# Allegro board 2_view_locked.brd
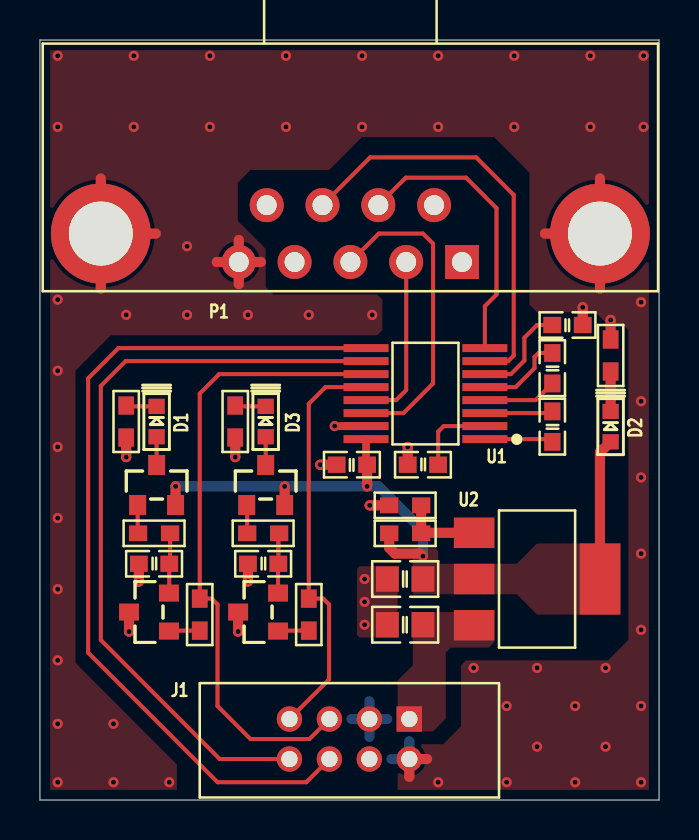
[diagram p0: board, top side]
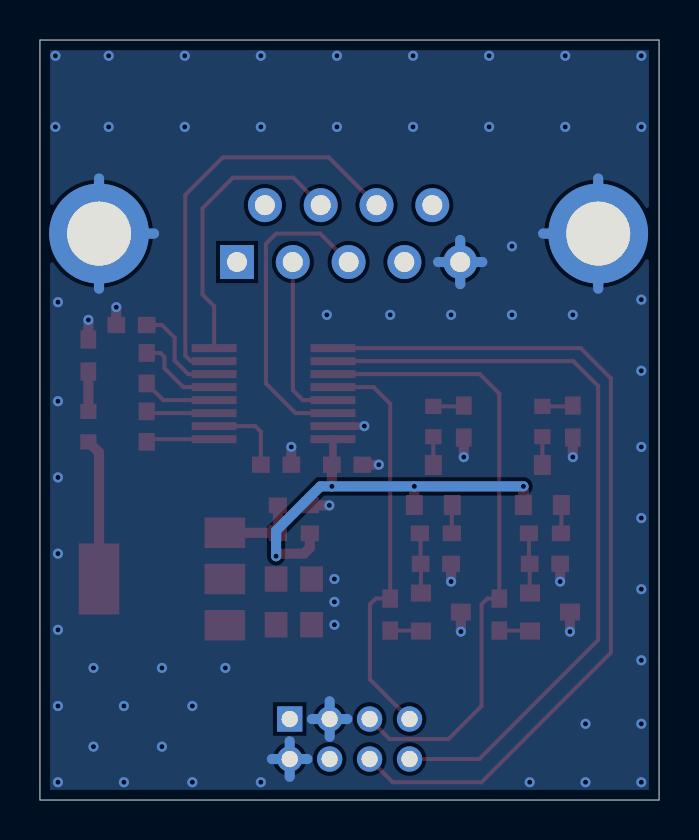
[diagram p1: board, bottom side, seen from below]

Outline 31 x 38 mm; copper layers: TOP, BOTTOM. Coordinates in mm from the lower left corner of the outline.
Outline path: 0,38 0,0 31,0 31,38 0,38

## Design rules (mm)
net group N23452239: nets N23452239 N23452241
net group N23452347: nets N23452347 N23452349
net group UART_RXD: nets N23452331 UART_RXD
net group UART_TXD: nets N23452223 UART_TXD

## Placement (name value [footprint] x y rotation side)
C1  0.1uF  [C0603]  25.65 18.67 90 top
C2  0.1uF  [C0603]  19.18 16.76 180 top
C3  0.1uF  [C0603]  15.62 16.76 0 top
C4  0.1uF  [C0603]  26.42 23.75 0 top
C5  0.1uF  [C0603]  25.65 21.59 90 top
C6  1uF  [C0603]  5.71 11.81 180 top
C7  10uF  [C0805]  18.29 8.76 180 top
C8  10uF  [C0805]  18.29 11.05 180 top
C9  1uF  [C0603]  11.18 11.81 180 top
D1  LED_GREEN  [LED0603]  5.84 18.92 90 top
D2  LED_GREEN  [LED0603]  28.57 18.67 90 top
D3  LED_GREEN  [LED0603]  11.3 18.92 90 top
J1  CONNECTOR  [DIP_2X4_2MM]  15.49 3.05 180 top
P1  -  [DB9_MALE]  3.05 28.32 0 top
Q1  2N5401  [SOT-23]  5.84 15.75 0 top
Q2  2N5401  [SOT-23]  5.46 9.4 90 top
Q3  2N5401  [SOT-23]  11.3 15.75 0 top
Q4  2N5401  [SOT-23]  10.92 9.4 90 top
R1  1K  [R0603]  5.71 13.34 180 top
R2  1K  [R0603]  8 9.27 270 top
R3  470R  [R0603]  4.32 18.92 270 top
R4  470R  [R0603]  28.57 22.23 90 top
R5  50K/1%  [R0603]  18.29 14.73 180 top
R6  82K/1%  [R0603]  18.29 13.34 180 top
R7  1K  [R0603]  11.18 13.34 180 top
R8  1K  [R0603]  13.46 9.27 270 top
R9  470R  [R0603]  9.78 18.92 270 top
U1  SP3232EEY  [TSSOP16]  19.3 20.32 180 top
U2  -  [LM1117-ADJ]  24.89 11.05 270 top

## Library data of the parts
C1-C5 = CAP NP_0
C6-C9 = CAP NP_1
D1 D3 = LED_4
D2 = LED
J1 = CONNECTOR_0
P1 = DB9_MALE_0
Q1-Q4 = 2N5401_1
R1-R4 R7-R9 = RES_1: signal model: DEFAULT_RESISTOR_470OHM_2_1
R5 R6 = RES_1
U1 = SP3232EEY_0
U2 = LM1117

## Footprints (pads in the part's own frame, mm; a bottom-side part is the same pattern mirrored in y, then rotated)
C0603
  rect 0.889x0.813 smd: 1(-0.762,0) 2(0.762,0)
C0805
  rect 1.143x1.27 smd: 1(-0.889,0) 2(0.889,0)
DB9_MALE
  rect 1.7x1.7 hole 1: 1(18.085,-1.422)
  round 1.7 hole 1: 2(15.291,-1.422) 3(12.497,-1.422) 4(9.703,-1.422) 5(6.909,-1.422) 6(16.688,1.422) 7(13.894,1.422) 8(11.1,1.422) 9(8.306,1.422)
  round 5 hole 3.2: 10(0,0) 11(24.994,0)
DIP_2X4_2MM
  rect 1.27x1.27 hole 0.813: 1(-3,-1)
  round 1.27 hole 0.813: 2(-3,1) 3(-1,-1) 4(-1,1) 5(1,-1) 6(1,1) 7(3,-1) 8(3,1)
LED0603
  rect 0.762x0.813 smd: 1(-0.76,0) 2(0.76,0)
LM1117-ADJ
  rect 1.524x2.032 smd: 1(-2.311,-3.15) 2(0,-3.15) 3(2.311,-3.15)
  rect 3.556x2.032 smd: 4(0,3.15)
R0603
  rect 0.914x0.787 smd: 1(-0.8,0) 2(0.8,0)
SOT-23
  rect 0.85x1 smd: 1(-0.95,-1) 2(0.95,-1) 3(0,1)
TSSOP16
  rect 2.25x0.4 smd: 1(-2.975,2.275) 2(-2.975,1.625) 3(-2.975,0.975) 4(-2.975,0.325) 5(-2.975,-0.325) 6(-2.975,-0.975) 7(-2.975,-1.625) 8(-2.975,-2.275) 9(2.975,-2.275) 10(2.975,-1.625) 11(2.975,-0.975) 12(2.975,-0.325) 13(2.975,0.325) 14(2.975,0.975) 15(2.975,1.625) 16(2.975,2.275)

## Nets
GND: C2.2 C3.1 C4.2 C6.2 C7.2 C8.2 C9.2 J1.2(8) J1.3(2) P1.5 P1.10 P1.11 Q2.3(COLLECTOR) Q4.3(COLLECTOR) R3.2 R4.2 R5.2 R9.2 U1.15(GND)
VCC_3V3: C3.2 C8.1 D2.1(ANODE) Q1.2(EMITTER) Q3.2(EMITTER) R6.2 U1.16(VCC) U2.2(OUT) U2.4(TAB)
VIN_5V: C7.1 J1.1 U2.3(IN)
RS232_CTS: P1.8 U1.7(T2OUT)
RS232_RTS: P1.7 U1.8(R2IN)
RS232_RXD: P1.2 U1.13(R1IN)
RS232_TXD: P1.3 U1.14(T1OUT)
UART_CTS: J1.8(5) U1.10(T2IN)
UART_RTS: J1.6 U1.9(R2OUT)
UART_RXD: J1.7(4) R8.1 U1.12(R1OUT)
UART_TXD: J1.5(3) R2.1 U1.11(T1IN)
N23451873: C1.1 U1.1(C1+)
N23451905: C5.1 U1.4(C2+)
N23451907: C1.2 U1.3(C1-)
N23451913: C4.1 U1.6(V-)
N23451915: C2.1 U1.2(V+)
N23451921: C5.2 U1.5(C2-)
N23452119: R5.1 R6.1 U2.1(ADJ)
N23452223: Q2.1(BASE) R2.2
N23452239: Q1.1(BASE) R1.2
N23452241: C6.1 Q2.2(EMITTER) R1.1
N23452262: D1.1(ANODE) Q1.3(COLLECTOR)
N23452331: Q4.1(BASE) R8.2
N23452347: Q3.1(BASE) R7.2
N23452349: C9.1 Q4.2(EMITTER) R7.1
N23452367: D3.1(ANODE) Q3.3(COLLECTOR)
N23452380: D3.2(CATHODE) R9.1
N234520751: D2.2(CATHODE) R4.1
N234522811: D1.2(CATHODE) R3.1

Pads without a net: J1 4; P1 1 4 6 9

## Via types
v1: diameter 0.508, hole 0.254, TOP to BOTTOM, 71 vias

## Routing (per net, layer and track width the routed paths; a pad name or vN(x,y) marks a point on that pad's centre or on a via; arc(x,y) is an arc through that point)
GND: length 62.6
  TOP w0.381: U1.15 v1(14.76,18.7)
  TOP w0.508: C9.2 v1(10.41,10.92) ; 8.85,26.9 P1.5 ; P1.5 11.06,26.9 ; P1.5 9.96,25.79 ; P1.5 9.96,28 ; P1.10 3.05,31.08 ; P1.10 3.05,25.57 ; P1.10 5.8,28.32 ; Q4.3 v1(9.92,8.42) ; C4.2 v1(27.18,24.64) ; P1.11 28.04,31.08 ; P1.11 28.04,25.57 ; P1.11 25.29,28.32 ; C2.2 v1(18.41,17.65) ; Q2.3 v1(4.46,8.42) ; R4.2 v1(28.57,24) ; R5.2 v1(16.51,14.73) ; R9.2 v1(9.78,17.14) ; R3.2 v1(4.32,17.14) ; 19.38,2.05 J1.2 18.49,1.16 ; C3.1 v1(14.03,16.76) ; C6.2 v1(4.95,10.92)
  BOTTOM w0.508: P1.10 5.8,28.32 ; P1.10 3.05,31.08 ; P1.10 3.05,25.57 ; P1.11 28.04,31.08 ; P1.11 28.04,25.57 ; P1.11 25.29,28.32 ; 15.6,4.05 J1.3 ; J1.3 17.38,4.05 ; J1.3 16.49,4.94 ; J1.3 16.49,3.16 ; J1.2 18.49,2.94 ; J1.2 19.38,2.05 ; J1.2 18.49,1.16 ; J1.2 17.6,2.05 ; P1.5 9.96,28 ; P1.5 8.85,26.9 ; P1.5 11.06,26.9 ; P1.5 9.96,25.79
  vias: v1(0.89,37.21) v1(0.89,33.66) v1(0.89,25.02) v1(0.89,21.46) v1(0.89,17.65) v1(0.89,14.1) v1(0.89,10.54) v1(0.89,6.99) v1(0.89,3.81) v1(0.89,0.89) v1(3.68,3.81) v1(3.68,0.89) v1(4.32,24.26) v1(4.7,37.21) v1(4.7,33.66) v1(6.48,0.89) v1(7.37,27.69) v1(7.37,24.26) v1(8.51,37.21) v1(8.51,33.66) v1(10.41,24.26) v1(12.32,37.21) v1(12.32,33.66) v1(13.46,24.26) v1(16.13,37.21) v1(16.13,33.66) v1(16.26,11.05) v1(16.26,9.91) v1(16.26,8.76) v1(16.64,24.26) v1(19.94,37.21) v1(19.94,33.66) v1(19.94,0.89) v1(21.72,6.6) v1(23.37,4.7) v1(23.37,0.89) v1(23.75,37.21) v1(23.75,33.66) v1(24.89,6.6) v1(24.89,2.67) v1(26.8,4.7) v1(26.8,0.89) v1(27.56,37.21) v1(27.56,33.66) v1(28.32,6.6) v1(28.32,2.67) v1(30.1,24.89) v1(30.1,19.94) v1(30.1,16.13) v1(30.1,12.32) v1(30.1,8.51) v1(30.1,4.7) v1(30.1,0.89) v1(30.23,37.21) v1(30.23,33.66)
VCC_3V3: length 28.3
  TOP w0.381: C3.2 16.33,16.82 U1.16
  TOP w0.508: Q1.2 v1(6.79,15.68) ; U2.4 28.04,17.38 D2.1 ; C3.2 v1(16.38,15.68) ; R6.2 17.49,12.61 17.78,12.32 19.05,12.32 ; Q3.2 v1(12.25,15.68)
  BOTTOM w0.508: v1(19.18,12.19) 19.18,13.46 16.96,15.68 v1(16.38,15.68) v1(12.25,15.68) v1(6.79,15.68)
RS232_CTS: length 20.9
  TOP w0.203: P1.8 16.54,32.13 21.84,32.13 23.72,30.25 23.72,22.23 23.44,21.94 U1.7
RS232_RTS: length 14.4
  TOP w0.203: P1.7 18.31,31.11 21.34,31.11 22.86,29.59 22.86,25.27 22.28,24.69 U1.8
RS232_RXD: length 8.6
  TOP w0.203: P1.2 18.34,20.5 17.84,20 U1.13
RS232_TXD: length 15.9
  TOP w0.203: U1.14 18.2,19.34 19.68,20.83 19.68,27.81 19.18,28.32 16.97,28.32 P1.3
UART_CTS: length 38.4
  TOP w0.203: J1.8 9,2.05 3.05,8 3.05,20.7 4.29,21.94 U1.10
UART_RTS: length 43.5
  TOP w0.203: J1.6 13.34,0.89 8.89,0.89 2.41,7.37 2.41,21.08 3.93,22.6 U1.9
UART_RXD: length 20.6
  TOP w0.203: U1.12 14.29,20.64 13.46,19.81 R8.1 14.19,10.07 14.48,9.78 14.48,6.03 J1.7
UART_TXD: length 31.8
  TOP w0.203: U1.11 8.98,21.3 8,20.32 R2.1 8.6,10.07 8.89,9.78 8.89,4.7 10.54,3.05 13.49,3.05 J1.5
N23451873: length 3.4
  TOP w0.203: U1.1 25.52,18.04 C1.1
N23451905: length 3.7
  TOP w0.203: U1.4 24.82,20 C5.1
N23451907: length 3.4
  TOP w0.203: U1.3 25.57,19.34 C1.2
N23451913: length 5.1
  TOP w0.203: C4.1 24.89,23.75 24.26,23.11 24.26,21.97 23.58,21.3 U1.6
N23451915: length 4.1
  TOP w0.203: U1.2 20.22,18.7 19.94,18.41 C2.1
N23451921: length 4.4
  TOP w0.203: U1.5 23.82,20.64 24.77,21.59 24.77,22.15 24.97,22.35 C5.2
N23452119: length 4.1
  TOP w0.508: R5.1 R6.1 19.11,13.36 U2.1
N23452223: length 1.5
  TOP w0.203: Q2.1 6.48,8.47 R2.2
N23452239: length 1.4
  TOP w0.203: Q1.1 4.89,13.36 R1.2
N23452241: length 3
  TOP w0.203: R1.1 6.52,11.85 C6.1 6.48,10.36 Q2.2
N23452262: length 1.4
  TOP w0.203: D1.1 Q1.3
N23452331: length 1.5
  TOP w0.203: R8.2 11.94,8.47 Q4.1
N23452347: length 1.4
  TOP w0.203: R7.2 10.38,14.73 Q3.1
N23452349: length 3
  TOP w0.203: R7.1 11.94,13.3 C9.1 11.92,11.79 Q4.2
N23452367: length 1.4
  TOP w0.203: Q3.3 D3.1
N23452380: length 1.5
  TOP w0.203: R9.1 9.82,19.68 D3.2
N234520751: length 2
  TOP w0.508: D2.2 R4.1
N234522811: length 1.5
  TOP w0.203: R3.1 4.36,19.68 D1.2

## Copper pours and planes (outline as drawn; the poured copper is in the pictures)
GND on TOP: 17.91,11.68 17.91,8.13 16,8.13 15.88,8.26 15.88,11.56 16,11.68
GND on TOP: 0.51,0.51 0.51,37.49 30.49,37.49 30.49,0.51 17.91,0.51 17.91,2.41 18.29,2.79 20.19,2.79 21.08,3.68 21.08,6.73 21.34,6.99 28.45,6.99 29.46,8 29.46,23.5 29.21,23.75 28.45,23.75 27.81,24.38 24.89,24.38 24.51,24.77 24.51,31.37 22.73,33.15 16.13,33.15 14.48,31.5 10.54,31.5 9.91,30.86 9.91,28.96 11.3,27.56 11.3,25.65 11.68,25.27 16.89,25.27 17.14,25.02 17.14,23.5 16.89,23.24 3.56,23.24 1.78,21.46 1.78,6.86 6.86,1.78 6.86,0.51
GND on BOTTOM: 0.51,0.51 0.51,37.49 30.49,37.49 30.49,0.51
VCC_3V3 on TOP: 18.67,10.29 23.88,10.29 24.89,9.27 29.08,9.27 29.08,12.83 24.89,12.83 23.88,11.81 20.07,11.81 19.94,11.94 19.94,12.45 19.81,12.57 18.8,12.57 18.67,12.45
VIN_5V on TOP: 18.67,9.4 18.67,6.73 17.91,5.97 17.91,3.43 19.68,3.43 20.32,4.06 20.32,7.37 20.57,7.62 22.48,7.62 22.73,7.87 22.73,9.4

## Text on the board
NCLEGEND-1-2: FIGURE | SIZE | 10.0 | 32.0 | 39.37 | 125.984 | DRILL CHART: TOP to BOTTOM | ALL UNITS ARE IN MILS | PLATED | QTY | 71 | 7 | 1 | 8 | 2
